# EAGLE board SmartHome (EAGLE 9.7.0)

Size 201.39 x 136.02 mm. Coordinates in mm from the lower left corner, seen from the top.
Outline: 0,0 201.39,0 201.39,136.02 0,136.02 0,0
Copper layers (1*16): Top 0.035mm / dielectric 1.5mm / Bottom 0.035mm
Design rules "default": minimum track width 6mil, minimum drill 0.35mm, track to track 6mil, track to pad 6mil, pad to pad 6mil, via to via 6mil, smd to smd 6mil, copper to edge 40mil, drill to drill 6mil, minimum pad ring 10mil, minimum via ring 8mil, stop-mask expansion 4mil, vias tented up to drill 0mil, thermal gap 10mil

## Footprints (pad centres in the part's own frame; a part is rotated, then mirrored left to right if it is on the bottom)
LEDRD254W60D565H860B = drill 0.981 pad 1.581: 1 -1.27,0; 2 1.27,0
1X02 = drill 1.016 long: 1 -1.27,0; 2 1.27,0
MOTOR = drill 1.118 pad 3.15 octagon: + 2.54,0; - -2.54,0
PIEZO = drill 1 pad 1.6: 1 -3.5,0; 2 3.5,0
GL5528 = drill 0.8 pad 1.4: 1 -1.702,0; 2 1.702,0
RESAD1016W63L850D250B = drill 0.83 pad 1.43: 1 -5.08,0; 2 5.08,0
HA-06-SM065 = drill 1 pad 1.676: 1 -2.54,-2.54; 2 0,2.54; 3 2.54,-2.54
SG90 = drill 1.016 long: 1 -2.54,0; 2 0,0; 3 2.54,0
ARDUINO-UNO-R3-SHIELD = drill 1.016 pad 1.88: 3.3V 24.13,-2.54; 5V 24.13,0; A0 24.13,12.7; A1 24.13,15.24; A2 24.13,17.78; A3 24.13,20.32; A4 24.13,22.86; A5 24.13,25.4; AREF -24.13,-13.97; D2 -24.13,20.32; D3 -24.13,17.78; D4 -24.13,15.24; D5 -24.13,12.7; D6 -24.13,10.16; D7 -24.13,7.62; D8 -24.13,3.81; D9 -24.13,1.27; D10 -24.13,-1.27; D11 -24.13,-3.81; D12 -24.13,-6.35; D13 -24.13,-8.89; GND@0 24.13,2.54; GND@1 24.13,5.08; GND@2 -24.13,-11.43; IOREF 24.13,-7.62; NC 24.13,-10.16; RES 24.13,-5.08; RX -24.13,25.4; SCL -24.13,-19.05; SDA -24.13,-16.51; TX -24.13,22.86; VIN 24.13,7.62
TSOP48 = drill 0.8: 1 -2.54,0; 2 0,0; 3 2.54,0
JHD-162A = drill 1.016 long: 1 -19.05,0; 2 -16.51,0; 3 -13.97,0; 4 -11.43,0; 5 -8.89,0; 6 -6.35,0; 7 -3.81,0; 8 -1.27,0; 9 1.27,0; 10 3.81,0; 11 6.35,0; 12 8.89,0; 13 11.43,0; 14 13.97,0; 15 16.51,0; 16 19.05,0

## Placement (x,y rotation side)
D1  RED  [LEDRD254W60D565H860B]  144.98,80.76 180 top
L1  LIGHTBULB  [1X02]  154.22,124.3 0 top
M1  MOTOR_HDR  [MOTOR]  105.22,124.3 0 top
PIEZO1  PIEZO  [PIEZO]  189.66,122.44 0 top
R1  PHOTOCELL_GL5528  [GL5528]  160.22,55.36 0 top
R2  220  [RESAD1016W63L850D250B]  136.09,55.36 0 top
R3  10k  [RESAD1016W63L850D250B]  158.95,47.74 90 top
RPOT1  250k  [HA-06-SM065]  100.53,60.44 0 top
SERVO1  SERVOSG90  [SG90]  186.04,51.33 0 top
U1  ARDUINO-UNO-R3-SHIELD  [ARDUINO-UNO-R3-SHIELD]  47.88,67.26 270 top
U3  IR-RECEIVERTSOP48  [TSOP48]  68.01,24.01 0 top
U4  LCD-16X2JHD-162A  [JHD-162A]  114.62,36.63 0 top

## Library data of the parts
D1 = Tinkercad; CATEGORY: Opto-Electronic; SUB-CATEGORY: LED; VALUE: LED_RED
L1 M1 PIEZO1 R1-R3 RPOT1 SERVO1 U1 U3 U4 = Tinkercad

## Nets
U1_5V: R2.2 R3.1 RPOT1.3 SERVO1.2 U1.5V U3.3 U4.2
U1_A0: U1.A0 U3.1
U1_A1: R1.1 R3.2 U1.A1
U1_D2: U1.D2 U4.14
U1_D3: U1.D3 U4.13
U1_D4: U1.D4 U4.12
U1_D5: U1.D5 U4.11
U1_D6: U1.D6 U4.6
U1_D7: U1.D7 U4.4
U1_D8: M1.+ U1.D8
U1_D9: M1.- U1.D9
U1_D10: L1.2 U1.D10
U1_D11: PIEZO1.1 U1.D11
U1_D12: D1.1 U1.D12
U1_D13: SERVO1.3 U1.D13
U1_GND: D1.2 L1.1 PIEZO1.2 R1.2 RPOT1.1 SERVO1.1 U1.GND@0 U1.GND@1 U1.GND@2 U3.2 U4.1 U4.5 U4.16
U4_LED+: R2.1 U4.15
U4_VO: RPOT1.2 U4.3

## Tracks (layer width: path | path; a pad name or v marks a point on that pad's centre or on a via)
U1_5V  (6 unrouted)
U1_A0  (1 unrouted)
U1_A1  (2 unrouted)
U1_D2  (1 unrouted)
U1_D3  (1 unrouted)
U1_D4  (1 unrouted)
U1_D5  (1 unrouted)
U1_D6  (1 unrouted)
U1_D7  (1 unrouted)
U1_D8  (1 unrouted)
U1_D9  (1 unrouted)
U1_D10  (1 unrouted)
U1_D11  (1 unrouted)
U1_D12  (1 unrouted)
U1_D13  (1 unrouted)
U1_GND  (12 unrouted)
U4_LED+  (1 unrouted)
U4_VO  (1 unrouted)